# Altium PCB BBB_parport.PcbDoc (part 2 of 2)
Units mil, origin at the board's own origin, x right, y up, seen from the top; angles counter-clockwise.
Board outline 3588.03 x 5478.78 mil, 2 copper layers (Top Layer, Bottom Layer); 87 components, 119 nets, 505 pads, 175 vias.
Unrouted connection lines stored in the file: 1.
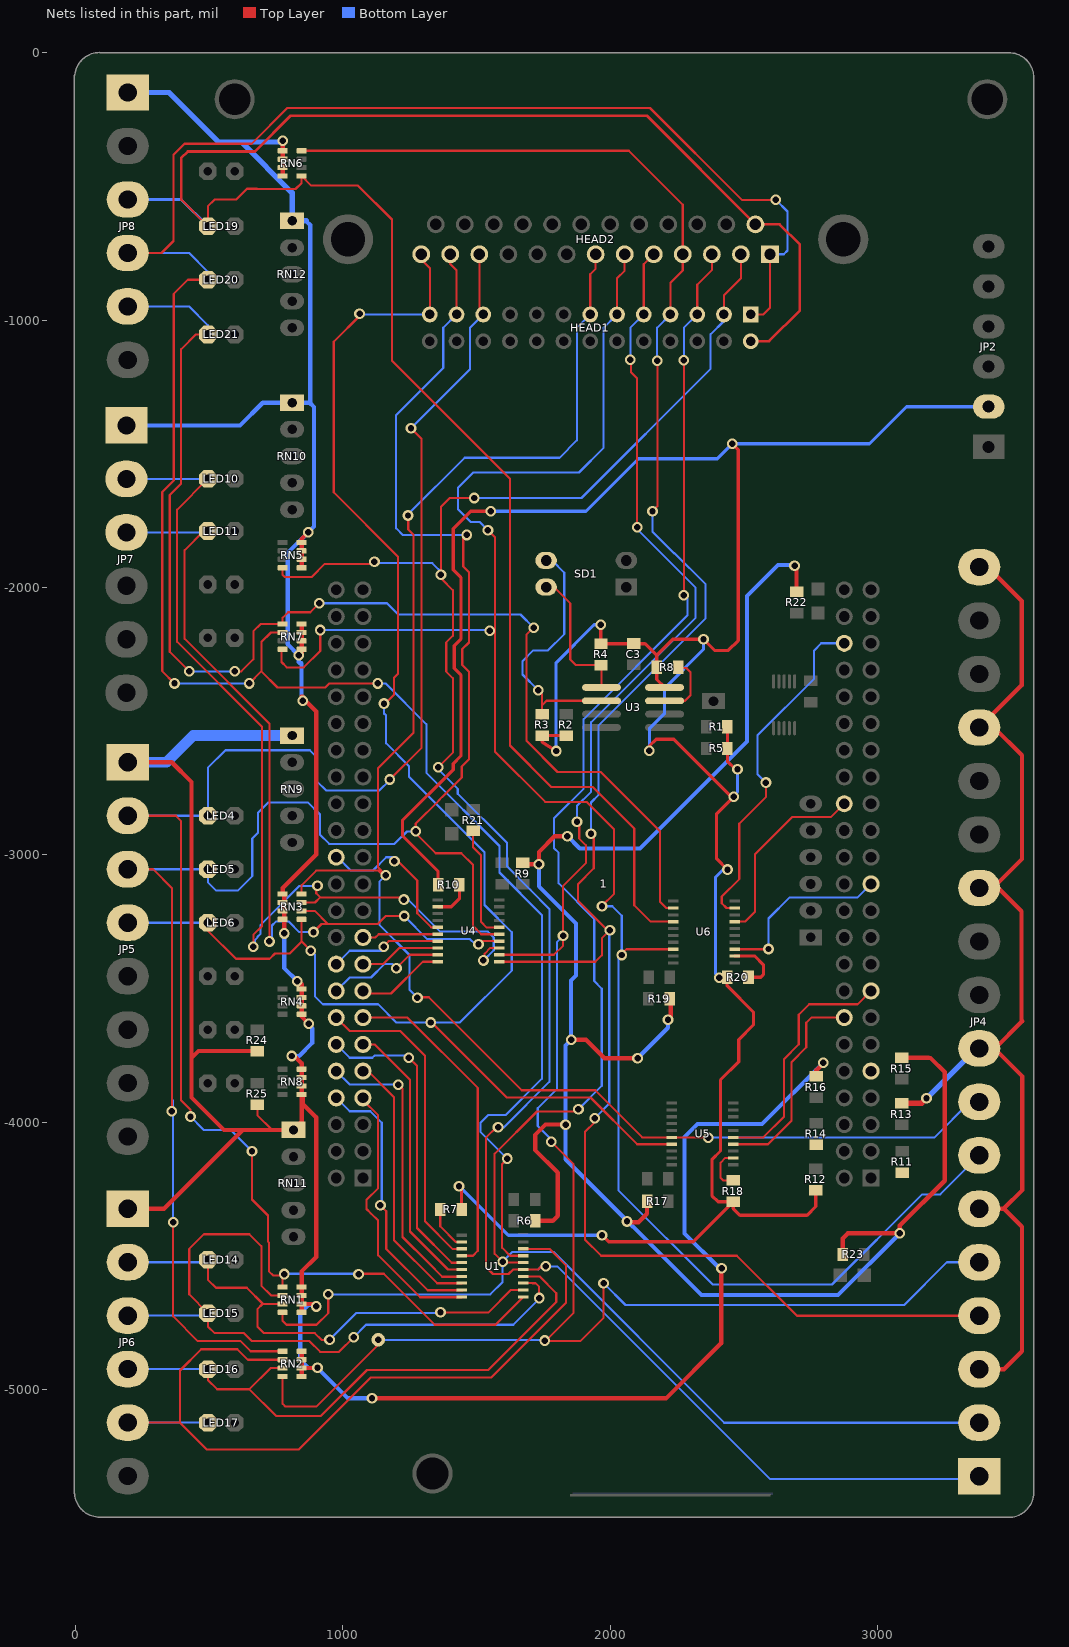
[diagram p2: the nets of this part, all layers, seen from the top]

## Via types
v1: diameter 40, hole 24, Top Layer to Bottom Layer, 163 vias
v2: diameter 50, hole 24, Top Layer to Bottom Layer, 12 vias

## Nets (pads, with @x,y where several pads share a name; then routed paths per layer and width w, separated by ;. In a path a pad name is that pad's centre, name@x,y a point inside that pad or via, vN(x,y) a via of type N, cw(c..) or ccw(c..) an arc to the next point about the centre after c; other vN are vias at no path point) (continued)
NetR3_2: R3.2 SD1.3 U3.2 | length 973.8
  Top Layer w8: v1@1730.87,-2383.91 v1(1731.69,-2384.73) 1731.69,-2385.55 1745.83,-2399.69 1745.83,-2440.31 ; R3.2@1745.83,-2473.82 1745.83,-2440.31 ; U3.2@1967.91,-2423.82 1762.32,-2423.82 1745.83,-2440.31
  Bottom Layer w8: v1(1731.69,-2384.73) 1672.36,-2325.4 1672.36,-2275.75 1712.99,-2235.12 1768.03,-2235.12 1828.78,-2174.37 1828.78,-1944.37 1783.23,-1898.82 SD1.3@1760.83,-1898.82
NetR4_2: R4.2 SD1.4 U3.1 | length 533.2
  Top Layer w8: SD1.4@1760.83,-1998.82 1790.79,-1998.82 1851.22,-2059.25 1851.22,-2269.21 1872.36,-2290.35 R4.2@1966.06,-2290.35 1967.91,-2292.2 U3.1@1967.91,-2373.82
NetR7_2: R7.2 U1.2 | length 168.1
  Top Layer w8: R7.2@1364.65,-4326.14 1364.65,-4389.25 1423.35,-4447.95 U1.2@1445.32,-4447.95
NetR8_1: R8.1 U3.7 | length 245.8
  Top Layer w8: U3.7@2203.75,-2423.82 2280.39,-2423.82 2300.58,-2403.63 2300.58,-2317.55 2284.29,-2301.26 2257.6,-2301.26 R8.1@2254.21,-2297.87
NetR10_2: R10.2 U4.2 | length 145.4
  Top Layer w12: U4.2@1355.95,-3194.25 1406.1,-3194.25 1436.5,-3163.86 R10.2@1436.5,-3111.61
NetR18_2: R18.2 U5.2 | length 163.5
  Top Layer w8: U5.2@2460.7,-4133.39 2430.91,-4133.39 2413.35,-4150.94 2413.35,-4208.74 2422.17,-4217.56 R18.2@2460.75,-4217.56
NetR20_2: R20.2 U6.2 | length 218
  Top Layer w12: U6.2@2465.7,-3378.39 2541.1,-3378.39 2573.39,-3410.67 2573.39,-3447.64 2563.19,-3457.83 R20.2@2517.68,-3457.83
POWER_BUT: 1.55
PWM0: 1.13 U1.4 | length 1215
  Top Layer w8: 1.13@1075.83,-3608.82 1242.32,-3608.82 1505.12,-3871.61 1505.12,-4481.22 1487.2,-4499.13 U1.4@1445.32,-4499.13
PWM1: 1.19 U4.6 | length 285.1
  Top Layer w8: 1.19@1075.83,-3308.82 1122.19,-3308.82 1134.19,-3296.82 U4.6@1355.95,-3296.82
RELAY: 1.76 U6.7 | length 718.8
  Top Layer w8: U6.7@2465.7,-3249.82 2504.67,-3249.82 2542.2,-3212.28 2542.2,-2997.24 2680.63,-2858.82 2711.96,-2858.82 2789.69,-2858.82 2825.83,-2858.82 1.76@2875.83,-2808.82
RELAY2: HEAD1.2 HEAD2.14 JP8.3 LED19.K RN6.1 U6.14 | length 7785.6
  Top Layer w8: 395.83,-548.82 LED19.K@495.83,-648.82 495.83,-574.61 521.61,-548.82 602.19,-548.82 642.19,-508.82 679.47,-508.82 680.47,-509.82 823.37,-509.82 846.26,-486.93 RN6.1@846.26,-464.41 ; RN6.1@846.26,-461.06 882.2,-497.01 1057.24,-497.01 1184.04,-623.8 1184.04,-1151.64 1625.68,-1593.28 1625.68,-1744.36 1625.39,-1744.65 1625.39,-2591.21 1780.11,-2745.92 1934.95,-2745.92 2090.59,-2901.57 2090.59,-3188.94 2151.47,-3249.82 U6.14@2235.83,-3249.82
  Top Layer w10: 395.83,-548.82 395.83,-393.82 420.47,-369.17 671.34,-369.17 804.8,-235.71 2137.46,-235.71 HEAD2.14@2543.68,-641.93 2633.54,-641.93 2709.69,-718.07 2709.69,-963.46 2594.33,-1078.82 HEAD1.2@2525.83,-1078.82
  Bottom Layer w10: JP8.3@195.83,-548.82 395.83,-548.82 LED19.K@495.83,-648.82
SPINDLE2: HEAD1.1 HEAD2.1 JP8.4 LED20.K RN7.2 U1.17 | length 9215.9
  Top Layer w8: JP8.4@195.83,-748.82 322.17,-748.82 366.83,-704.16 366.83,-381.81 408.46,-340.17 659.33,-340.17 792.79,-206.71 2149.47,-206.71 2492.88,-550.12 v1(2620.04,-550.12) ; v1(370.83,-2358.82) 324.83,-2312.82 324.83,-1642.62 367.83,-1599.62 367.83,-901.82 420.83,-848.82 LED20.K@495.83,-848.82 ; v1(650.83,-2358.82) 695.83,-2313.82 ; RN7.2@775.39,-2168.07 731.57,-2168.07 695.83,-2203.82 695.83,-2313.82 ; 948.05,-2358.82 949.46,-2358.82 ; v1(1130.83,-2358.82) 949.46,-2358.82 ; v1(1615.31,-4135.98) 1615.31,-4137.05 1596.28,-4156.09 1596.28,-4470.06 1625.35,-4499.13 U1.17@1675.2,-4499.13 ; HEAD1.1@2525.83,-978.82 2572.48,-978.82 2598.03,-953.27 HEAD2.1@2598.03,-753.74 ; 695.83,-2313.82 755.83,-2373.82 934.46,-2373.82 949.46,-2358.82
  Bottom Layer w8: JP8.4@195.83,-748.82 425.83,-748.82 495.83,-818.82 LED20.K@495.83,-848.82 ; v1(370.83,-2358.82) v1(650.83,-2358.82) ; v1(1130.83,-2358.82) 1160.47,-2358.82 1312.95,-2511.3 1312.95,-2693.36 1586.5,-2966.91 1586.5,-3066.27 1744.96,-3224.72 1744.96,-3837.15 1609.34,-3972.77 1544.79,-3972.77 1514.83,-4002.73 1514.83,-4035.5 v1(1615.31,-4135.98) ; HEAD2.1@2598.03,-753.74 2649.37,-753.74 2663.54,-739.57 2663.54,-593.62 v1(2620.04,-550.12)
SPINDLE_DIR: 1.88 U6.9 | length 1294.1
  Top Layer w8: U6.9@2465.7,-3198.82 2435.55,-3198.82 2417.8,-3181.06 2417.8,-3155.94 2483.15,-3090.59 2483.15,-2883.78 2582.76,-2784.17 v1(2582.77,-2729.64)
  Bottom Layer w8: v1(2582.77,-2729.64) 2550.75,-2697.62 2550.75,-2553.32 2763.03,-2341.03 2763.03,-2235.59 2789.8,-2208.82 1.88@2875.83,-2208.82
SPINDLE_DIR2: JP8.5 LED21.K RN7.1 U6.12 | length 4641
  Top Layer w8: v1(425.83,-2313.82) 352.83,-2240.82 352.83,-1654.22 395.83,-1611.22 395.83,-1108.82 450.83,-1053.82 LED21.K@495.83,-1053.82 ; v1(595.83,-2313.82) 620.83,-2313.82 665.83,-2268.82 665.83,-2163.82 693.07,-2136.57 RN7.1@775.39,-2136.57 775.39,-2113.39 796.34,-2092.44 878.39,-2092.44 v1(912.01,-2058.82) ; v1@1711.69,-2151.22 1687.68,-2175.24 1687.68,-2574.3 1803.3,-2689.92 1964.59,-2689.92 2186.57,-2911.91 2186.57,-3175.51 2209.88,-3198.82 U6.12@2235.83,-3198.82
  Bottom Layer w8: JP8.5@195.83,-948.82 425.83,-948.82 495.83,-1018.82 LED21.K@495.83,-1053.82 ; v1(425.83,-2313.82) v1(595.83,-2313.82) ; v1(912.01,-2058.82) 1165.83,-2058.82 1208.15,-2101.14 1665.2,-2101.14 v1(1714.17,-2150.12)
STATUS_LED: 1.26 U4.5 | length 622.8
  Top Layer w8: v1(1193.49,-3023.6) 1188.52,-3018.64 1188.52,-3013.33 1189.96,-3011.89 1195.12,-3011.89 1278.98,-3095.75 1278.98,-3218.74 1331.26,-3271.02 U4.5@1355.95,-3271.02
  Bottom Layer w8: 1.26@975.83,-3008.82 980.83,-3008.82 1030.24,-3058.23 1113.54,-3058.23 1162.6,-3009.17 v1@1198.11,-3009.17
STATUS_LED2: R21.2 U4.16 | length 430.2
  Top Layer w8: R21.2@1487.52,-2909.96 1487.52,-2972.17 1517.6,-3002.24 1517.6,-3251.3 1537.32,-3271.02 U4.16@1585.83,-3271.02
SYS_5VA: R6.2 R9.2 R15.2 R17.2 R19.2 R22.2 R23.2 | length 7118
  Top Layer w16: R9.2@1673.15,-3030.28 1678.35,-3035.47 v1(1733.78,-3035.47) 1733.78,-2989.49 1793.22,-2930.05 v1(1840.53,-2930.05) v1@1840.53,-2931.44 ; R6.2@1719.96,-4368.94 1785.47,-4368.94 1804.61,-4349.8 1804.61,-4189.06 1719.57,-4104.02 1719.57,-4047.86 1758.57,-4008.86 v1(1833.43,-4008.86) ; v1(1854.17,-3691.34) 1909.69,-3691.34 1978.78,-3760.43 v1(2102.8,-3760.42) ; v1(2063.27,-4371.02) 2053.07,-4371.02 2063.27,-4381.22 2063.27,-4374.13 2106.54,-4374.13 2138.31,-4342.36 R17.2@2138.31,-4296.18 ; v1(2216.65,-3616.85) 2227.28,-3606.22 2227.28,-3541.34 R19.2@2223.5,-3537.56 ; v1(2690,-1918.94) 2697.56,-1926.5 R22.2@2697.56,-2015.51 ; R23.2@2870.04,-4490.51 2870.04,-4434.57 2888.94,-4415.67 v1(3083.31,-4415.67) 3083.31,-4386.61 3251.38,-4218.54 3251.38,-3812.4 3198.66,-3759.69 3191.38,-3759.69 3190.51,-3758.82 R15.2@3100.83,-3758.82
  Bottom Layer w16: v1(1733.78,-3035.47) 1733.78,-3117.8 1872.36,-3256.38 1872.36,-3451.61 1854.17,-3469.8 v1(1854.17,-3691.34) 1856.14,-3689.37 1857.09,-3689.37 1833.62,-3712.83 1833.62,-4138.5 2341.5,-4646.38 2852.6,-4646.38 v1(3083.31,-4415.67) v1@3085,-4413.98 ; v1(1840.53,-2930.05) 1886.67,-2976.18 2112.17,-2976.18 2512.13,-2576.22 2512.13,-2031.81 2628.31,-1915.63 2691.65,-1915.63 2691.65,-1916.46 2692.48,-1917.28 2690.83,-1918.94 v1(2690,-1918.94) ; v1(2102.8,-3760.42) 2216.65,-3646.57 v1(2216.65,-3616.85)
SYS_5VB: JP5.1 JP6.1 JP7.1 JP8.1 R16.1 R24.1 R25.1 RN1.5 RN1.6 RN1.7 RN1.8 RN2.5 RN2.6 RN2.7 RN2.8 RN3.5 RN3.6 RN3.7 RN3.8 RN4.5 RN4.6 RN4.7 RN4.8 RN5.5 RN5.6 RN5.7 RN5.8 RN6.5 RN6.6 RN6.7 RN6.8 RN7.5 RN7.6 RN7.7 RN7.8 RN8.5 RN8.6 RN8.7 RN8.8 RN9.1 RN10.1 RN11.1 RN12.1 | length 14000.2
  Top Layer w8: R25.1@680.83,-3933.82 680.83,-3973.82 735.83,-4028.82 ; R24.1@680.83,-3733.82 R24.1@700.83,-3733.82
  Top Layer w16: JP5.1@195.83,-2653.82 360.83,-2653.82 434.83,-2727.82 434.83,-3759.82 ; JP6.1@221.18,-4323.46 JP6.1@195.83,-4323.46 331.18,-4323.46 625.83,-4028.82 ; R24.1@680.83,-3733.82 460.83,-3733.82 434.83,-3759.82 ; RN6.8@775.39,-461.06 775.83,-460.63 v1(775.83,-328.82) ; v1(780.83,-3293.82) 780.83,-3152.01 RN3.5@775.39,-3146.57 775.39,-3124.25 900.83,-2998.82 900.83,-2463.82 845.83,-2408.82 846.83,-2407.82 849.83,-2407.82 850.83,-2408.82 v1(850.83,-2423.82) ; v1@809.2,-3752.19 v1(809.68,-3752.19) 809.68,-3757.67 810.83,-3758.82 825.83,-3758.82 846.26,-3779.25 RN8.8@846.26,-3801.57 RN8.7@846.26,-3833.07 RN8.6@846.26,-3864.57 RN8.5@846.26,-3896.06 ; RN11.1@815.83,-4028.82 735.83,-4028.82 625.83,-4028.82 ; v1(830.31,-3472.82) 830.31,-3468.3 846.26,-3484.25 RN4.8@846.26,-3501.57 RN4.7@846.26,-3533.07 RN4.6@846.26,-3564.57 RN4.5@846.26,-3596.06 846.26,-3604.7 v1(873.26,-3631.71) ; v1(835.83,-2253.82) 846.26,-2243.39 RN7.5@846.26,-2231.06 RN7.6@846.26,-2199.57 RN7.7@846.26,-2168.07 RN7.8@846.26,-2136.57 ; RN11.1@841.28,-4003.36 846.26,-3998.39 RN8.5@846.26,-3896.06 ; RN2.5@846.26,-4951.06 RN2.6@846.26,-4919.57 ; RN2.8@846.26,-4856.57 RN2.7@846.26,-4888.07 RN2.6@846.26,-4919.57 ; RN1.5@846.26,-4711.06 RN1.6@846.26,-4679.57 ; RN5.5@846.26,-1926.06 RN5.6@846.26,-1894.57 RN5.7@846.26,-1863.07 RN5.8@846.26,-1831.57 846.26,-1818.39 v1(870.83,-1793.82) ; v1(900.83,-4688.82) 891.57,-4679.57 RN1.6@846.26,-4679.57 ; v1(905.83,-4918.82) 905.08,-4919.57 RN2.6@846.26,-4919.57 ; v1(1109.41,-5032.8) 2209.41,-5032.8 2415.39,-4826.81 2415.39,-4553.11 2408.58,-4546.3 v1(2416.93,-4546.3) ; R16.1@2770.83,-3828.82 2770.83,-3806.02 2797.05,-3779.8 v1(2797.05,-3777.91) ; 434.83,-3759.82 434.83,-3907.82 555.83,-4028.82 625.83,-4028.82 ; RN1.6@846.26,-4679.57 RN1.7@846.26,-4648.07 RN1.8@846.26,-4616.57 846.26,-4558.39 900.83,-4503.82 900.83,-3981.82 850.83,-3931.82 850.83,-3900.63 RN8.5@846.26,-3896.06
  Bottom Layer w16: JP7.1@190.83,-1393.82 615.83,-1393.82 700.83,-1308.82 RN10.1@810.83,-1308.82 876.5,-1308.82 892.36,-1324.68 892.36,-1772.28 v1(870.83,-1793.82) 793.9,-1870.75 793.9,-2211.89 v1(835.83,-2253.82) 835.83,-2278.82 840.83,-2283.82 845.83,-2283.82 845.83,-2418.82 v1(850.83,-2423.82) ; v1(780.83,-3293.82) 780.83,-3423.34 v1(830.31,-3472.82) ; v1(809.68,-3752.19) 837.45,-3752.19 885.7,-3703.95 885.7,-3648.95 873.26,-3636.51 v1(873.26,-3631.71) ; 862.95,-628.82 878.83,-644.69 878.83,-1311.14 ; v1(900.83,-4688.82) 905.83,-4683.82 870.83,-4683.82 840.83,-4713.82 840.83,-4888.82 870.83,-4918.82 v1(905.83,-4918.82) 1019.8,-5032.8 v1(1109.41,-5032.8) ; v1(2416.93,-4546.3) 2408.58,-4546.3 2278.43,-4416.14 2278.43,-4055.04 2326.97,-4006.5 2568.46,-4006.5 v1(2797.05,-3777.91)
  Bottom Layer w20: JP8.1@185.83,-148.82 350.83,-148.82 535.83,-333.82 620.83,-333.82 ; v1(775.83,-328.82) 770.83,-333.82 620.83,-333.82 ; RN12.1@810.83,-628.82 862.95,-628.82 ; RN12.1@810.83,-613.82 810.83,-523.82 620.83,-333.82
  Bottom Layer w40: JP5.1@190.83,-2653.82 JP5.1@195.83,-2653.82 340.83,-2653.82 440.83,-2553.82 RN9.1@810.83,-2553.82
VDD_3V3A: R11.2
VDD_3V3B: C3.2 JP2.2 R1.1 R2.1 R3.1 R4.1 R5.1 R7.1 R8.2 R10.1 R12.1 R18.1 R20.1 U3.8 | length 10676.1
  Top Layer w12: R10.1@1356.5,-3111.61 1356.5,-3060.83 1223.39,-2927.72 1223.39,-2871.51 1413.36,-2681.53 1413.36,-2658.91 1442.01,-2630.26 1442.01,-2327.01 1417.29,-2302.29 1417.29,-2217.79 1442.01,-2193.07 1442.01,-1962.23 1413.27,-1933.49 1413.27,-1779.88 1478.62,-1714.53 1553.67,-1714.53 v1@1554.46,-1714.54 ; v1(1434.96,-4239.17) 1444.65,-4248.86 R7.1@1444.65,-4326.14 ; v1(1798.07,-2611.57) 1745.83,-2578.15 R3.1@1745.83,-2553.82 R2.1@1835.83,-2553.82 ; v1(1965.16,-2139.09) 1965.16,-2209.45 R4.1@1966.06,-2210.35 2130.71,-2210.35 2174.21,-2253.86 ; v1(1969.76,-4422.52) 1994.57,-4447.32 2310.98,-4447.32 R18.1@2460.75,-4297.56 ; v1(2147.01,-2610.43) 2147.01,-2592.95 2171.97,-2567.99 2238.31,-2567.99 2296.04,-2625.72 2348.08,-2677.76 2452.6,-2782.28 v1(2462.01,-2782.28) 2398.3,-2846 2398.3,-3014.18 v1(2439.12,-3055) ; U3.8@2203.75,-2373.82 2174.21,-2344.28 R8.2@2174.21,-2297.87 2174.21,-2253.86 ; v1(2408.35,-3459.29) 2409.8,-3457.83 R20.1@2437.68,-3457.83 2437.68,-3489.72 2535.83,-3587.87 2535.83,-3636.39 2480.83,-3691.39 2480.83,-3773.94 2412.89,-3841.87 2412.89,-4107.58 2380.83,-4139.65 2380.83,-4274.53 2403.86,-4297.56 R18.1@2460.75,-4297.56 ; R1.1@2438.94,-2520.98 R5.1@2438.94,-2602.05 2438.94,-2649.69 2469.05,-2679.8 v1(2476.47,-2679.8) ; v1(2456.34,-1462.24) 2479.02,-1484.92 2479.02,-2198.54 2442.36,-2235.2 2390.63,-2235.2 v1(2349.29,-2193.86) 2234.21,-2193.86 2174.21,-2253.86 ; R12.1@2769.45,-4253.5 2769.45,-4315.24 2736.93,-4347.76 2485.47,-4347.76 2460.75,-4323.03 R18.1@2460.75,-4297.56
  Bottom Layer w12: v1(1434.96,-4239.17) 1436.34,-4239.17 1619.69,-4422.52 v1(1969.76,-4422.52) ; v1(1553.68,-1714.54) 1909.83,-1714.54 2106.22,-1518.15 2400.43,-1518.15 v1(2456.34,-1462.24) 2970.12,-1462.24 3108.54,-1323.82 JP2.2@3415.83,-1323.82 ; v1(1798.07,-2611.57) 1798.07,-2280.87 1939.84,-2139.09 v1(1965.16,-2139.09) ; v1(2147.01,-2610.43) 2147.01,-2527.6 2203.66,-2470.95 2203.66,-2377.2 2349.29,-2231.57 v1(2349.29,-2193.86) ; v1(2408.35,-3459.29) 2394.33,-3445.27 2394.33,-3083.19 2427.87,-3049.65 2433.23,-3055 v1(2439.12,-3055) ; v1(2462.01,-2782.28) 2462.01,-2779.8 2476.47,-2765.34 v1(2476.47,-2679.8)
VDD_5VA: JP4.3 JP4.6 JP4.9 JP4.12 JP4.15 JP4.18 R13.2 | length 4179.6
  Top Layer w16: JP4.3@3380.83,-4923.82 3472.95,-4923.82 3540.24,-4856.54 3540.24,-4390.91 3473.15,-4323.82 3471.22,-4323.82 ; JP4.6@3380.83,-4323.82 3471.22,-4323.82 ; JP4.9@3380.83,-3723.82 JP4.9@3437.2,-3723.82 ; JP4.12@3380.83,-3123.82 JP4.12@3431.93,-3123.82 ; JP4.18@3380.83,-1923.82 3412.28,-1923.82 3539.37,-2050.91 3539.37,-2365.28 JP4.15@3380.83,-2523.82 3436.3,-2523.82 3540.24,-2627.76 3540.24,-3015.51 JP4.12@3431.93,-3123.82 ; JP4.12@3431.93,-3123.82 3451.73,-3123.82 3538.54,-3210.63 3538.54,-3619.76 3541.1,-3622.32 3439.61,-3723.82 JP4.9@3437.2,-3723.82 ; JP4.9@3437.2,-3723.82 3541.97,-3828.58 3541.97,-4253.07 3471.22,-4323.82
  Top Layer w20: R13.2@3100.83,-3928.82 3165.28,-3928.82 v1(3183.35,-3910.75)
  Bottom Layer w20: v1(3183.35,-3910.75) 3370.28,-3723.82 JP4.9@3380.83,-3723.82
VDD_5VB: R14.1
XDIR: 1.11 U1.6 | length 1047.9
  Top Layer w8: 1.11@1075.83,-3708.82 1119.09,-3708.82 1251.5,-3841.22 ; 1251.5,-4224.76 1251.45,-4224.8 ; 1251.45,-3841.26 1251.45,-4224.8 ; U1.6@1442.29,-4551.07 1393.71,-4551.07 1251.45,-4408.82 1251.45,-4224.8
XDIR2: HEAD1.3 HEAD2.2 JP4.1 RN5.4 U1.15 | length 7746.2
  Top Layer w8: RN5.4@775.39,-1926.06 775.39,-1953.39 782.91,-1960.91 883.74,-1960.91 932.95,-1911.69 v1@1118.7,-1911.69 ; v1(1357.36,-2672.48) 1412.01,-2617.83 1412.01,-2339.43 1387.29,-2314.72 1387.29,-2205.36 1412.01,-2180.65 1412.01,-2009.96 1369.35,-1967.3 1381.5,-1955.16 1378.98,-1952.64 v1(1367.36,-1952.64) 1367.36,-1698.39 1400.55,-1665.2 v1(1491.5,-1665.2) ; v1(1580.94,-4018.7) 1581.5,-4018.15 1581.5,-4016.54 1577.28,-4016.54 1535.43,-4058.39 1535.43,-4541.5 1561.81,-4567.87 1619.88,-4567.87 1637.24,-4550.52 U1.15@1675.2,-4550.52 1731.27,-4550.52 1731.38,-4550.63 1742.24,-4539.76 1759.57,-4539.76 v1(1759.59,-4539.01) ; HEAD1.3@2425.83,-978.82 2425.83,-907.4 2489.33,-843.9 HEAD2.2@2489.33,-753.74
  Bottom Layer w8: v1@1118.7,-1904.92 v1(1118.7,-1903.66) 1123.83,-1908.78 1335.12,-1908.78 v1@1373.17,-1946.83 ; v1@1353.48,-2676.36 1430.46,-2753.34 1430.46,-2771.28 1614.5,-2955.32 1614.5,-3042.89 1701.78,-3130.17 1701.78,-3131.05 1772.96,-3202.23 1772.96,-3848.75 1603.01,-4018.7 v1(1580.94,-4018.7) ; v1(1491.5,-1665.2) 1892.87,-1665.2 2375.83,-1182.24 2375.83,-1053.12 2425.83,-1003.12 HEAD1.3@2425.83,-978.82 ; 1731.38,-4550.63 1742.24,-4539.76 1759.57,-4539.76 v1(1759.59,-4539.01) 1802.78,-4539.01 2597.6,-5333.82 3305.83,-5333.82 JP4.1@3315.83,-5323.82
XHOME: 1.7 U1.10 | length 1027.2
  Top Layer w8: 1.7@1075.83,-3908.82 1075.83,-3917.4 1132.48,-3974.06 1132.48,-4246.81 1088.86,-4290.43 1088.86,-4324.61 1104.94,-4340.69 1105.47,-4340.69 1132.48,-4367.7 1132.48,-4497.83 1289.39,-4654.74 U1.10@1445.76,-4654.74
XHOME2: HEAD1.21 HEAD2.11 JP5.2 LED4.K RN1.1 U1.11 | length 6698
  Top Layer w8: JP5.2@195.83,-2853.82 375.83,-2853.82 395.83,-2873.82 395.83,-3918.82 430.83,-3953.82 v1(430.83,-3978.82) ; v1(660.83,-4108.82) 660.83,-4288.9 720.83,-4348.9 720.83,-4446.22 723.83,-4449.22 723.83,-4556.82 740.83,-4573.82 760.83,-4573.82 ; RN1.1@775.39,-4616.57 775.39,-4573.62 v1(781.18,-4567.83) ; v1@1049.33,-4566.5 1153.31,-4566.5 1344.31,-4757.5 1571.21,-4757.5 U1.11@1675.2,-4653.52 ; v1(1175.68,-2718.29) 1295.12,-2598.85 1295.12,-1444.49 v1(1255.31,-1404.69) ; HEAD2.11@1511.02,-753.74 1511.02,-955.91 1525.83,-970.71 HEAD1.21@1525.83,-978.82
  Bottom Layer w8: JP5.2@190.83,-2853.82 JP5.2@195.83,-2853.82 LED4.K@495.83,-2853.82 495.83,-2674.41 561.42,-2608.82 876.65,-2608.82 902.99,-2635.16 902.99,-2724.53 937.44,-2758.98 1137.83,-2758.98 1174.02,-2722.8 1174.02,-2719.95 v1(1175.68,-2718.29) v1@1169.53,-2712.14 ; v1@425.83,-3973.82 480.83,-4028.82 580.83,-4028.82 v1(660.83,-4108.82) ; v1(781.18,-4567.83) 781.18,-4566.5 1057.56,-4566.5 v1(1059.25,-4568.19) ; v1(1255.31,-1404.69) 1475.83,-1184.17 1475.83,-1104.52 1475.83,-1053.12 1475.83,-1028.82 HEAD1.21@1525.83,-978.82
XMAX: 1.9 U1.8 | length 1015.5
  Top Layer w8: 1.9@1075.83,-3808.82 1080.83,-3803.82 1089.69,-3803.82 1191.26,-3905.39 1191.26,-4440.35 1353.29,-4602.39 U1.8@1445.09,-4602.39
XMAX2: JP6.3 LED15.K RN1.2 U1.13 | length 2658.8
  Top Layer w8: RN1.2@775.39,-4648.07 732.51,-4648.07 695.83,-4611.39 695.83,-4463.82 650.83,-4418.82 480.83,-4418.82 425.83,-4473.82 425.83,-4643.82 LED15.K@495.83,-4713.82 495.83,-4763.82 520.83,-4788.82 630.83,-4788.82 660.83,-4818.82 875.83,-4818.82 915.83,-4858.82 985.83,-4858.82 v1(1040.83,-4803.82) v1@1040.83,-4818.82 ; U1.13@1675.2,-4601.52 1708.64,-4601.52 1709.14,-4602.02 1721.31,-4602.02 1734.72,-4615.43 v1(1734.72,-4657.72)
  Bottom Layer w8: JP6.3@195.83,-4723.46 LED15.K@496.18,-4723.46 ; v1(1040.83,-4803.82) 1087.14,-4757.5 1637.69,-4757.5 1734.72,-4660.47 v1(1734.72,-4657.72)
XMIN: 1.8 U1.9 | length 1040.3
  Top Layer w8: v1(1141.1,-4310.79) 1163.03,-4332.72 1163.03,-4474.09 1317.44,-4628.5 U1.9@1447.57,-4628.5
  Bottom Layer w8: 1.8@975.83,-3908.82 1025.83,-3958.82 1102.76,-3958.82 1145.83,-4001.89 1145.83,-4306.06 v1(1141.1,-4310.79)
XMIN2: JP6.2 LED14.K RN1.3 U1.12 | length 1886.6
  Top Layer w8: LED14.K@495.83,-4513.82 495.83,-4588.82 525.83,-4618.82 640.83,-4618.82 701.57,-4679.57 ; RN1.3@775.39,-4679.57 701.57,-4679.57 ; v1(950.83,-4813.82) 920.83,-4813.82 895.83,-4788.82 705.83,-4788.82 680.83,-4763.82 680.83,-4698.82 700.08,-4679.57 701.57,-4679.57 ; v1@1365.59,-4712.24 1543.86,-4712.24 1628.58,-4627.52 U1.12@1675.2,-4627.52
  Bottom Layer w8: JP6.2@195.83,-4523.46 LED14.K@473.83,-4523.46 ; LED14.K@483.47,-4513.82 LED14.K@473.83,-4523.46 ; LED14.K@491.18,-4523.46 LED14.K@473.83,-4523.46 ; v1(950.83,-4813.82) 1051.14,-4713.5 v1@1365.59,-4713.5
  other v1: 1365.59,-4710.39
XSTEP: 1.12 U1.5 | length 1175.9
  Top Layer w8: v1(1246.68,-3758.37) 1277.68,-3789.37 1277.68,-4395.39 1408.03,-4525.75 U1.5@1445.95,-4525.75
  Bottom Layer w8: 1.12@975.83,-3708.82 1025.83,-3758.82 1049.46,-3758.82 ; 1044.46,-3758.82 1049.46,-3758.82 ; v1(1246.68,-3758.37) 1239.09,-3750.79 1239.09,-3750.28 1119.37,-3750.28 1110.83,-3758.82 1049.46,-3758.82
XSTEP2: HEAD1.5 HEAD2.3 JP4.2 RN1.4 U1.16 | length 7470.1
  Top Layer w8: RN1.4@775.39,-4711.06 775.39,-4743.39 789.69,-4757.68 901.97,-4757.68 945.83,-4713.82 v1(945.83,-4643.82) ; U1.16@1675.2,-4524.72 1641.54,-4524.72 1641.44,-4524.82 1601.24,-4524.82 v1(1598.11,-4521.69) 1568.28,-4491.86 1568.28,-4118.1 1726.65,-3959.72 1880.31,-3959.72 1880.31,-3952.51 v1(1881.62,-3951.2) ; v1(2275.83,-2029.21) v1(2275.83,-1149.8) ; HEAD1.5@2325.83,-978.82 2325.83,-867.8 2380.63,-812.99 HEAD2.3@2380.63,-753.74
  Bottom Layer w8: v1(945.83,-4643.82) 1551.54,-4643.82 1597.44,-4597.91 1597.44,-4541.65 v1@1612.09,-4527.01 ; v1@1610.23,-4509.58 1635.12,-4484.69 1788.06,-4484.69 2427.2,-5123.82 JP4.2@3315.83,-5123.82 ; v1(1881.62,-3951.2) 1969.05,-3863.78 1969.05,-3500.2 1940.56,-3471.71 1940.56,-3239.72 1807.36,-3106.53 1807.36,-2991.85 1789.61,-2974.09 1789.61,-2863.89 1901.18,-2752.32 1901.18,-2492.38 2289.21,-2104.35 2289.21,-2042.6 v1(2275.83,-2029.21) ; v1(2275.83,-1149.8) 2275.83,-1028.82 HEAD1.5@2325.83,-978.82
YDIR: 1.15 U4.10 | length 333.6
  Top Layer w8: 1.15@1075.83,-3508.82 1085.83,-3518.82 1180.83,-3518.82 1299.83,-3399.82 U4.10@1355.95,-3399.82
YDIR2: HEAD1.7 HEAD2.4 JP4.4 RN6.4 U4.11 | length 7908.6
  Top Layer w8: RN6.4@846.26,-366.57 2070.28,-366.57 2271.93,-568.23 HEAD2.4@2271.93,-753.74 2271.93,-814.21 2225.83,-860.32 HEAD1.7@2225.83,-978.82 ; U4.11@1585.83,-3399.82 1944.98,-3399.82 1969.21,-3375.59 1969.21,-3312.4 v1(1999.45,-3282.17) 1990.04,-3282.17 1879.8,-3171.93 1879.8,-3109.68 1939.09,-3050.39 1939.09,-2931.68 v1(1928.53,-2921.12) v1@1933.36,-2916.3 ; v1(1942.05,-3984.88) 1942.05,-4000.51 1906.39,-4036.17 1906.39,-4439.06 1966.61,-4499.29 2474.33,-4499.29 2698.86,-4723.82 JP4.4@3380.83,-4723.82 ; v1(2158.54,-1714.41) 2176.65,-1696.3 v1(2176.65,-1151.61)
  Bottom Layer w8: v1(1928.53,-2921.12) 1928.53,-2804.16 1957.18,-2775.52 1957.18,-2515.57 2357.24,-2115.51 2357.24,-1987.99 2241.06,-1871.81 2238.9,-1871.81 2158.54,-1791.46 v1(2158.54,-1714.41) ; v1(1942.05,-3984.88) 1997.05,-3929.88 v1@1997.05,-3282.17 ; v1@2175.83,-1151.61 2175.83,-1028.82 HEAD1.7@2225.83,-978.82
YHOME2: HEAD1.23 HEAD2.12 JP5.3 LED5.K RN2.1 U4.15 | length 7126.1
  Top Layer w8: JP5.3@195.83,-3053.82 290.83,-3053.82 360.83,-3123.82 v1(360.83,-3958.82) ; v1(365.83,-4373.82) 365.83,-4726.25 458.4,-4818.82 618.25,-4818.82 656.01,-4856.57 RN2.1@775.39,-4856.57 ; HEAD2.12@1402.32,-753.74 1402.32,-789.92 1425.83,-813.43 HEAD1.23@1425.83,-978.82 ; v1(1463.48,-1803.54) 1450.83,-1816.2 1450.83,-1921.27 1472.01,-1942.45 1472.01,-2205.5 1447.29,-2230.22 1447.29,-2289.86 1472.01,-2314.58 1472.01,-2642.69 1445.16,-2669.54 1445.16,-2710.71 1373.21,-2782.65 1372.81,-2782.65 1358.76,-2796.71 1358.76,-2797.11 1273.07,-2882.8 1273.07,-2918.9 1347.95,-2993.78 1443.7,-2993.78 1487.3,-3037.38 1487.3,-3266.28 1517.84,-3296.82 U4.15@1585.83,-3296.82
  Bottom Layer w8: JP5.3@190.83,-3053.82 JP5.3@195.83,-3053.82 LED5.K@495.83,-3053.82 495.83,-3103.03 526.46,-3133.66 607.2,-3133.66 661.42,-3079.45 661.42,-2938.78 683.04,-2917.16 683.04,-2843.14 722.36,-2803.82 769.05,-2803.82 ; v1(360.83,-3958.82) 360.83,-3913.82 365.83,-3918.82 v1(365.83,-4373.82) ; 767.05,-2803.86 869.76,-2803.86 915.16,-2849.25 915.16,-2924.52 949.46,-2958.82 1193.94,-2958.82 1240.32,-2912.44 v1@1273.07,-2912.44 ; HEAD1.23@1425.83,-978.82 1375.83,-1028.82 1375.83,-1179.13 1199.8,-1355.16 1199.8,-1778.58 1224.76,-1803.54 v1(1463.48,-1803.54)
  other v1: 1273.07,-2911.46
YMAX: 1.14 U1.3 | length 1193.3
  Top Layer w8: 1.14@975.83,-3608.82 1025.83,-3658.82 1049.46,-3658.82 ; 1048.05,-3658.82 1049.46,-3658.82 ; U1.3@1445.76,-4474.76 1411.34,-4474.76 1307.45,-4370.88 1307.45,-3750.8 1215.47,-3658.82 1049.46,-3658.82
YMAX2: JP6.5 LED17.K RN2.2 U1.18 | length 3161.9
  Top Layer w8: JP6.5@195.83,-5123.46 391.18,-5123.46 ; RN2.2@775.39,-4888.07 645.08,-4888.07 605.83,-4848.82 470.83,-4848.82 391.18,-4928.46 391.18,-5123.46 ; U1.18@1675.2,-4473.54 1773.54,-4473.54 1834.64,-4534.64 1834.64,-4675.79 1555.93,-4954.5 1105.15,-4954.5 835.83,-5223.82 491.54,-5223.82 391.18,-5123.46
  Bottom Layer w8: JP6.5@195.83,-5123.46 495.47,-5123.46 LED17.K@495.83,-5123.82
YMIN: 1.10 U1.7 | length 1119.2
  Top Layer w8: v1(1207.5,-3859.4) 1223.45,-3875.36 1223.45,-4429 1319.35,-4524.9 1372.11,-4577.66 U1.7@1451.66,-4577.66
  Bottom Layer w8: 1.10@975.83,-3808.82 1025.83,-3858.82 1193.15,-3858.82 1193.86,-3858.11 1206.2,-3858.11 v1(1207.5,-3859.4)
YMIN2: JP6.4 LED16.K RN2.3 U1.14 | length 2215.3
  Top Layer w8: LED16.K@495.83,-4923.82 495.83,-4963.82 530.83,-4998.82 650.83,-4998.82 ; RN2.3@775.39,-4919.57 730.08,-4919.57 650.83,-4998.82 ; U1.14@1675.2,-4576.52 1735.97,-4576.52 1798.5,-4639.06 1798.5,-4672.32 1544.33,-4926.5 1090.72,-4926.5 918.4,-5098.82 750.83,-5098.82 650.83,-4998.82
  Bottom Layer w8: JP6.4@195.83,-4923.46 495.47,-4923.46 LED16.K@495.83,-4923.82
YSTEP: 1.16 U4.9 | length 448.5
  Top Layer w8: v1(1200.83,-3423.82) 1250.83,-3373.82 U4.9@1355.95,-3373.82
  Bottom Layer w8: 1.16@975.83,-3508.82 1025.83,-3458.82 1105.83,-3458.82 1155.83,-3408.82 1185.83,-3408.82 v1(1200.83,-3423.82)
YSTEP2: HEAD1.9 HEAD2.5 JP4.5 RN2.4 U4.12 | length 7929.6
  Top Layer w8: RN2.4@775.39,-4951.06 775.39,-5053.39 785.83,-5063.82 900.83,-5063.82 1145.83,-4818.82 1145.83,-4808.82 1137.69,-4808.82 v2(1132.69,-4813.82) ; U4.12@1585.83,-3373.82 1666.89,-3373.82 1666.93,-3373.78 1789.76,-3373.78 1824.21,-3339.33 v1(1824.21,-3303.03) 1824.21,-3115.87 1909.33,-3030.75 1909.33,-2964.15 1884.53,-2939.35 1884.53,-2884.18 v1(1876.22,-2875.87) ; v1(1780.16,-4073.31) 1862.64,-4155.79 1862.64,-4713.82 1759.8,-4816.66 v1(1756.04,-4816.66) 1757.97,-4818.58 1888.78,-4818.58 1975.67,-4731.69 v1(1975.67,-4601.93) ; v1(2075.83,-1147.95) 2078.13,-1150.25 2078.13,-1195.33 2101.02,-1218.23 v1(2101.02,-1775.2) ; HEAD1.9@2125.83,-998.52 HEAD1.9@2125.83,-978.82 2125.83,-791.14 HEAD2.5@2163.23,-753.74
  Bottom Layer w8: v2(1132.69,-4813.82) v1@1749.88,-4813.82 ; v1(1780.16,-4073.31) 1780.16,-4064.37 1729.61,-4013.82 1729.61,-3947.72 1800.96,-3876.36 1800.96,-3326.28 v1(1824.21,-3303.03) ; v1(1876.22,-2875.87) 1876.22,-2816.87 1929.18,-2763.92 1929.18,-2503.98 2319.83,-2113.33 2319.83,-2000.5 2101.02,-1781.69 v1(2101.02,-1775.2) ; v1(1975.67,-4601.93) 2057.44,-4683.7 3099.53,-4683.7 3259.41,-4523.82 JP4.5@3315.83,-4523.82 ; v1(2075.83,-1147.95) 2075.83,-1028.82 HEAD1.9@2125.83,-978.82
ZDIR: 1.69 U6.3 | length 710.9
  Top Layer w8: U6.3@2465.7,-3352.8 2596.97,-3352.8 2596.3,-3352.13 v1(2592.36,-3352.13)
  Bottom Layer w8: v1(2592.36,-3352.13) 2592.36,-3237.95 2671.5,-3158.82 2925.83,-3158.82 ; 2902.19,-3158.82 2925.83,-3158.82 ; 1.69@2975.83,-3108.82 2925.83,-3158.82
ZDIR2: HEAD1.11 HEAD2.6 JP4.7 RN7.4 U6.18 | length 7271.8
  Top Layer w8: RN7.4@775.39,-2231.06 770.83,-2235.63 770.83,-2278.82 790.83,-2298.82 854.45,-2298.82 915.83,-2237.44 v1(915.83,-2159.21) ; v1(1543.03,-1786.22) 1569.39,-1812.58 1569.39,-2614.4 1756.91,-2801.92 1911.75,-2801.92 2014.96,-2905.13 2014.96,-3145.22 v1@1967.83,-3192.35 ; HEAD1.11@2025.83,-978.82 2025.83,-843.98 2054.53,-815.28 HEAD2.6@2054.53,-753.74 ; v1@2039.09,-3374.61 2060.91,-3352.8 U6.18@2235.83,-3352.8
  Bottom Layer w8: v1(915.83,-2159.21) 947.65,-2159.21 948.05,-2158.82 v1@1554.25,-2158.82 ; v1(1543.03,-1786.22) 1511.5,-1754.69 1477.95,-1754.69 1431.77,-1708.5 1431.77,-1626.06 1487.8,-1570.04 1883.74,-1570.04 1975.83,-1477.95 1975.83,-1028.82 HEAD1.11@2025.83,-978.82 ; v1@1547.28,-2158.82 v1(1550.28,-2161.81) ; v1(1969.67,-3192.35) 2008.31,-3192.36 2043.45,-3227.5 2043.45,-3374.54 v1(2043.39,-3374.61) 2030.79,-3387.2 2030.79,-4254.41 2383.31,-4606.93 2829.82,-4606.93 3166.91,-4269.84 3234.8,-4269.84 JP4.7@3380.83,-4123.82
ZHOME: 1.60 U5.4 | length 793.4
  Top Layer w8: U5.4@2460.7,-4082.2 2590.39,-4082.2 2678.83,-3993.76 2678.83,-3775.01 2733.83,-3720.01 2733.83,-3627.72 2752.72,-3608.82 1.60@2875.83,-3608.82
ZHOME2: HEAD1.25 HEAD2.13 JP5.4 LED6.K RN3.1 U5.17 | length 6362.4
  Top Layer w8: LED6.K@495.83,-3253.82 495.83,-3283.82 600.83,-3388.82 726.48,-3388.82 746.48,-3368.82 801.69,-3368.82 846.26,-3324.25 ; RN3.1@846.26,-3241.06 846.26,-3324.25 ; v1(880.83,-3358.82) 846.26,-3324.25 ; v1@1068.37,-978.84 966.39,-1080.82 966.39,-1644.11 1206.8,-1884.52 1206.8,-2323.11 1191.72,-2338.18 1191.72,-2401.11 v1@1156.54,-2436.3 ; HEAD2.13@1293.62,-753.74 1293.62,-773.19 1325.83,-805.39 HEAD1.25@1325.83,-978.82 ; v1(1329.72,-3626.97) 1333.09,-3626.97 1613.32,-3907.2 1926.65,-3907.2 2101.65,-4082.2 U5.17@2230.83,-4082.2
  Bottom Layer w8: JP5.4@190.83,-3253.82 JP5.4@195.83,-3253.82 LED6.K@495.83,-3253.82 ; v1(880.83,-3358.82) 895.83,-3373.82 895.83,-3528.82 925.83,-3558.82 1132.44,-3558.82 1200.59,-3626.97 v1(1329.72,-3626.97) 1438.03,-3626.97 1632.09,-3432.91 1632.09,-3289.28 1530.5,-3187.7 1530.5,-2990.11 1248.11,-2707.72 1248.11,-2669.02 1162.26,-2583.17 1162.26,-2479.04 1154.37,-2471.14 v1(1154.37,-2434.13) 1158.7,-2429.76 v1@1163.07,-2434.13 ; v1(1063.11,-976.18) 1059.17,-980.12 1059.17,-987.99 1068.35,-978.82 HEAD1.25@1325.83,-978.82
ZMAX: 1.18 U4.7 | length 411.3
  Top Layer w8: v1(1153.46,-3343.94) 1153.46,-3341.18 1171.83,-3322.82 U4.7@1355.95,-3322.82
  Bottom Layer w8: 1.18@975.83,-3408.82 1025.83,-3358.82 v1@1150.83,-3358.82 ; v1(1153.46,-3343.94) v1@1153.46,-3341.18
ZMAX2: JP7.3 LED11.K RN3.2 U4.14 | length 3178.7
  Top Layer w8: LED11.K@495.83,-1788.82 480.83,-1788.82 408.83,-1860.82 408.83,-2191.82 725.83,-2508.82 v1(725.83,-3323.82) ; RN3.2@846.26,-3209.57 895.08,-3209.57 944.33,-3258.82 ; v1(890.83,-3288.82) 920.83,-3258.82 944.33,-3258.82 ; v1@1226.89,-3213.82 1212.13,-3228.58 1161.41,-3228.58 1131.18,-3258.82 944.33,-3258.82 ; v1(1507.72,-3334.88) 1519.78,-3322.82 U4.14@1585.83,-3322.82
  Bottom Layer w8: JP7.3@190.83,-1793.82 490.83,-1793.82 LED11.K@495.83,-1788.82 ; v1(725.83,-3323.82) 725.83,-3328.82 735.29,-3338.28 735.29,-3264.36 749.83,-3249.82 799.05,-3249.82 838.05,-3288.82 v1(890.83,-3288.82) ; v1(1229.92,-3228.58) 1316.46,-3315.13 1476.27,-3315.13 1496.02,-3334.88 v1(1507.72,-3334.88)
ZMIN: 1.17 U4.8 | length 303.7
  Top Layer w8: 1.17@1075.83,-3408.82 1150.83,-3408.82 1210.63,-3349.02 ; 1211.83,-3347.82 U4.8@1355.95,-3347.82
ZMIN2: JP7.2 LED10.K RN3.3 U4.13 | length 3648.8
  Top Layer w8: LED10.K@495.83,-1593.82 380.83,-1708.82 380.83,-2203.42 697.83,-2520.42 697.83,-3266.82 665.83,-3298.82 v1(665.83,-3343.82) ; RN3.3@846.26,-3178.07 896.57,-3178.07 915.83,-3158.82 ; v1(905.83,-3116.04) 903.6,-3116.04 900.83,-3118.82 900.83,-3143.82 915.83,-3158.82 ; 945.83,-3158.82 915.83,-3158.82 ; 948.05,-3158.82 1220.55,-3158.82 v1(1229.02,-3167.28) ; v1@1526.65,-3394.88 v1(1526.33,-3394.88) 1526.33,-3383.24 1530.83,-3378.74 1530.83,-3369.39 1552.4,-3347.82 U4.13@1585.83,-3347.82
  Bottom Layer w8: JP7.2@190.83,-1593.82 LED10.K@495.83,-1593.82 ; v1(665.83,-3343.82) 670.83,-3343.82 670.83,-3318.82 681.83,-3307.82 681.83,-3305.59 692.83,-3294.59 692.83,-3261.82 838.6,-3116.04 v1(905.83,-3116.04) ; v1(1229.02,-3167.28) 1245.24,-3167.28 1365.08,-3287.13 1542.82,-3287.13 1549.04,-3293.35 1564.65,-3308.98 1564.65,-3356.56 v1(1526.33,-3394.88)
ZSTEP: 1.61 U5.5 | length 941.9
  Top Layer w8: U5.5@2460.7,-4056.61 2572.63,-4056.61 2650.83,-3978.42 2650.83,-3763.42 2705.83,-3708.42 2705.83,-3597.61 2744.62,-3558.82 2772.09,-3558.82 2911.26,-3558.7 ; 2902.19,-3558.82 2925.83,-3558.82 1.61@2975.83,-3508.82
ZSTEP2: HEAD1.13 HEAD2.7 JP4.8 RN3.4 U5.16 | length 6179.9
  Top Layer w8: RN3.4@846.26,-3146.57 846.26,-3113.39 900.83,-3058.82 1133.62,-3058.82 1150.59,-3075.79 v1(1160.75,-3075.79) 1131.65,-3046.69 1131.65,-2676.14 1264.54,-2543.26 1264.54,-1802.57 1245,-1783.03 v1@1245,-1735.71 ; v1@1270.94,-3532.6 v1@1277.67,-3532.6 ; v1(1279.38,-3534.31) v1@1277.67,-3532.6 ; HEAD1.13@1925.83,-978.82 1925.83,-828.31 1945.83,-808.31 HEAD2.7@1945.83,-753.74 ; v1(2366.89,-4057.72) 2347.52,-4057.72 2346.42,-4056.61 U5.16@2230.83,-4056.61 2120.35,-4056.61 1944.37,-3880.63 1669.8,-3880.63 1321.77,-3532.6 v1@1277.67,-3532.6
  Bottom Layer w8: v1@1158.13,-3079.16 1137.18,-3100.1 1137.18,-3262.02 1249.84,-3374.69 1249.84,-3504.77 v1(1279.38,-3534.31) ; v1(1244.21,-1730.83) 1244.21,-1726.14 1455.83,-1514.53 1811.26,-1514.53 1875.83,-1449.96 1875.83,-1028.82 HEAD1.13@1925.83,-978.82 ; v1(2366.89,-4057.72) 2848.36,-4057.72 ; 2844.93,-4057.76 3212.13,-4057.76 3346.06,-3923.82 JP4.8@3380.83,-3923.82
pads on no net: 1.3 1.4 1.5 1.6 1.20 1.21 1.22 1.23 1.24 1.25 1.27 1.28 1.29 1.30 1.31 1.32 1.33 1.34 1.35 1.36 1.37 1.38 1.39 1.40 1.41 1.42 1.43 1.44 1.45 1.46 1.74 1.75 1.77 1.78 1.79 1.80 1.81 1.82 1.83 1.84 1.85 1.86 H1.0 H2.0 H3.0 HEAD2. JP3.1 JP3.2 JP3.3 JP3.4 JP3.5 JP3.6 logo1.0 logo.0 RN1.0 RN2.0 RN3.0 RN4.0 RN5.0 RN6.0 RN7.0 RN8.0 RN8.1 RN8.2 U2.2 U6.10 U6.11
copper on no net: | length 117.1
  Top Layer w8: 2849.46,-3658.82 2902.19,-3658.82
  Bottom Layer w8: 2631.73,-3659.21 2632.13,-3658.82 ; 3326.93,-2723.82 3380.83,-2723.82 ; 3373.82,-3330.83 3380.83,-3323.82

## Polygon pours and split planes (outlines as drawn)
GND on Top Layer "top" (solid, pour order 4): 21.26,-16.93 21.89,-16.3 3564.53,-16.3 3564.53,-5448.35 3557.44,-5455.43 1864.53,-5455.43 62.52,-5455.43 24.61,-5417.52 22.25,-5415.16 22.25,-5313.19
GND on Bottom Layer "BOT" (solid, pour order 3): 21.21,-19.28 21.84,-18.65 3564.48,-18.65 3564.48,-5450.7 3557.39,-5457.79 1864.48,-5457.79 62.47,-5457.79 24.56,-5419.88 22.19,-5417.51 22.19,-5315.54

## Keep-outs
Keep-Out Layer:
  lines w8: 0.83,-5388.74 0.83,-85.2 ; 1.02,-5382.91 ccw(c91.02,-5382.91) 91.02,-5472.91 ; 1.22,-93.11 cw(c91.22,-93.11) 91.22,-3.11 ; 82.2,-3.82 3490.83,-3.82 cw(c3490.83,-93.82) 3580.83,-93.82 3580.83,-5384.29 ; 87.48,-5473.82 3495.87,-5473.82 ; 3490.39,-5473.86 ccw(c3490.39,-5383.86) 3580.39,-5383.86

## Silkscreen, mask and mechanical layers (free items; w line width, h text height)
Top Overlay:
  text "5V" at 348.23,-71.73 h80 r270
  text "AE" at 348.23,-277.2 h80 r270
  text "RL" at 348.23,-476.3 h80 r270
  text "SPL" at 348.23,-632.8 h80 r270
  text "SPD" at 348.23,-861.69 h80 r270
  text "GND" at 348.23,-1223.66 h80
  text "5V" at 348.23,-1321.61 h80 r270
  text "Zm" at 348.23,-1515.35 h80 r270
  text "ZM" at 348.23,-1715.51 h80 r270
  text "Am" at 348.23,-1914.61 h80 r270
  text "5V" at 3232.68,-1915.47 h90 r90
  text "AM" at 348.23,-2111.57 h80 r270
  text "CS" at 3232.68,-2142.56 h90 r90
  text "CD" at 3232.68,-2361.61 h90 r90
  text "GND" at 348.23,-2465.04 h80
  text "5V" at 348.23,-2567.24 h80 r270
  text "5V" at 3232.68,-2577.99 h90 r90
  text "XH" at 348.23,-2767.4 h80 r270
  text "BS" at 3232.68,-2786.38 h90 r90
  text "YH" at 348.23,-2966.46 h80 r270
  text "BD" at 3232.68,-2986.73 h90 r90
  text "ZH" at 348.23,-3174.09 h80 r270
  text "5V" at 3232.68,-3176.42 h90 r90
  text "AS" at 3232.68,-3368.74 h90 r90
  text "AH" at 348.23,-3381.69 h80 r270
  text "AD" at 3232.68,-3561.1 h90 r90
  text "BH" at 348.23,-3577.6 h80 r270
  text "CH" at 348.23,-3769.21 h80 r270
  text "ZS" at 3232.68,-3983.35 h90 r90
  text "GND" at 348.23,-4002.36 h80 r270
  text "ZD" at 3232.68,-4199.53 h90 r90
  text "5V" at 348.23,-4320.71 h80
  text "5V" at 3232.68,-4401.61 h90 r90
  text "Xm" at 348.23,-4442.09 h80 r270
  text "YS" at 3232.68,-4616.54 h90 r90
  text "XM" at 348.23,-4644.33 h80 r270
  text "YD" at 3232.68,-4814.21 h90 r90
  text "Ym" at 348.23,-4845.55 h80 r270
  text "5V" at 3232.68,-5000.67 h90 r90
  text "YM" at 348.23,-5037.2 h80 r270
  text "XS" at 3232.68,-5211.77 h90 r90
  text "GND" at 348.23,-5217.13 h80 r270
  text "XD" at 3232.68,-5411.93 h90 r90

## Text inside footprints (layer, text, board x,y; h text height)
1: Mechanical 16 "P8" at 1000.83,-1908.82 h77.5; Mechanical 16 "P9" at 2900.83,-1908.82 h77.5
HEAD1: Top Overlay "2" at 2625.83,-1058.82 h50 r180; Top Overlay "1" at 2605.83,-958.82 h50 r180; Top Overlay "25" at 1265.83,-958.82 h50 r180; Top Overlay "26" at 1265.83,-1058.82 h50 r180
HEAD2: Top Overlay "25" at 1397.18,-460.83 h59.06 r180; Top Overlay "14" at 2592.89,-460.83 h59.06 r180; Top Overlay "13" at 1342.83,-834.84 h59.06 r180; Top Overlay "1" at 2607.87,-834.84 h59.06 r180
logo: Top Overlay "Jungle.vn" at 1950.31,-5355.08 h60
logo1: Bottom Overlay "Jungle.vn" at 2508.46,-5349.29 h60